# EAGLE board midi-switcher-panel5 (EAGLE 9.5.2), part 1 of 2
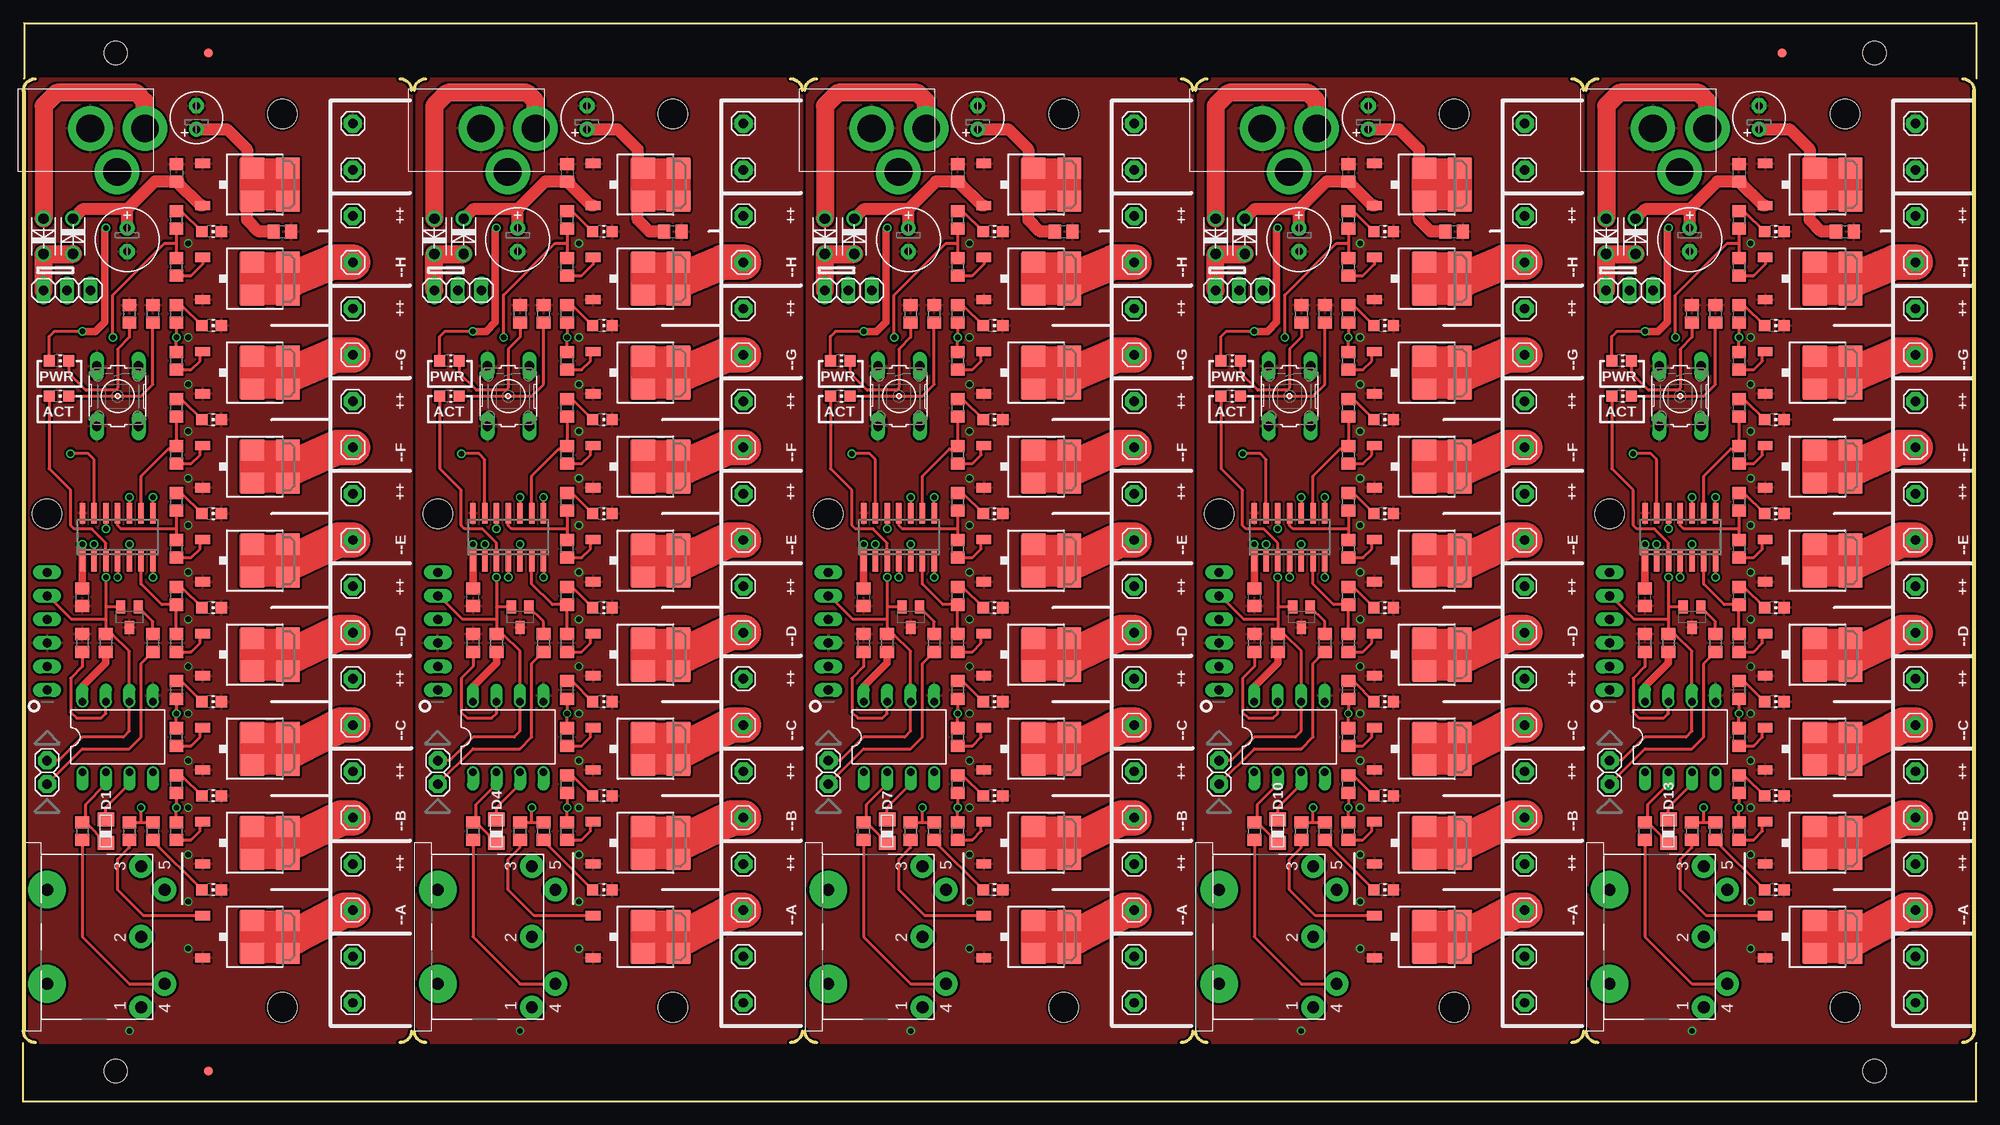
[diagram p0: board, top side]
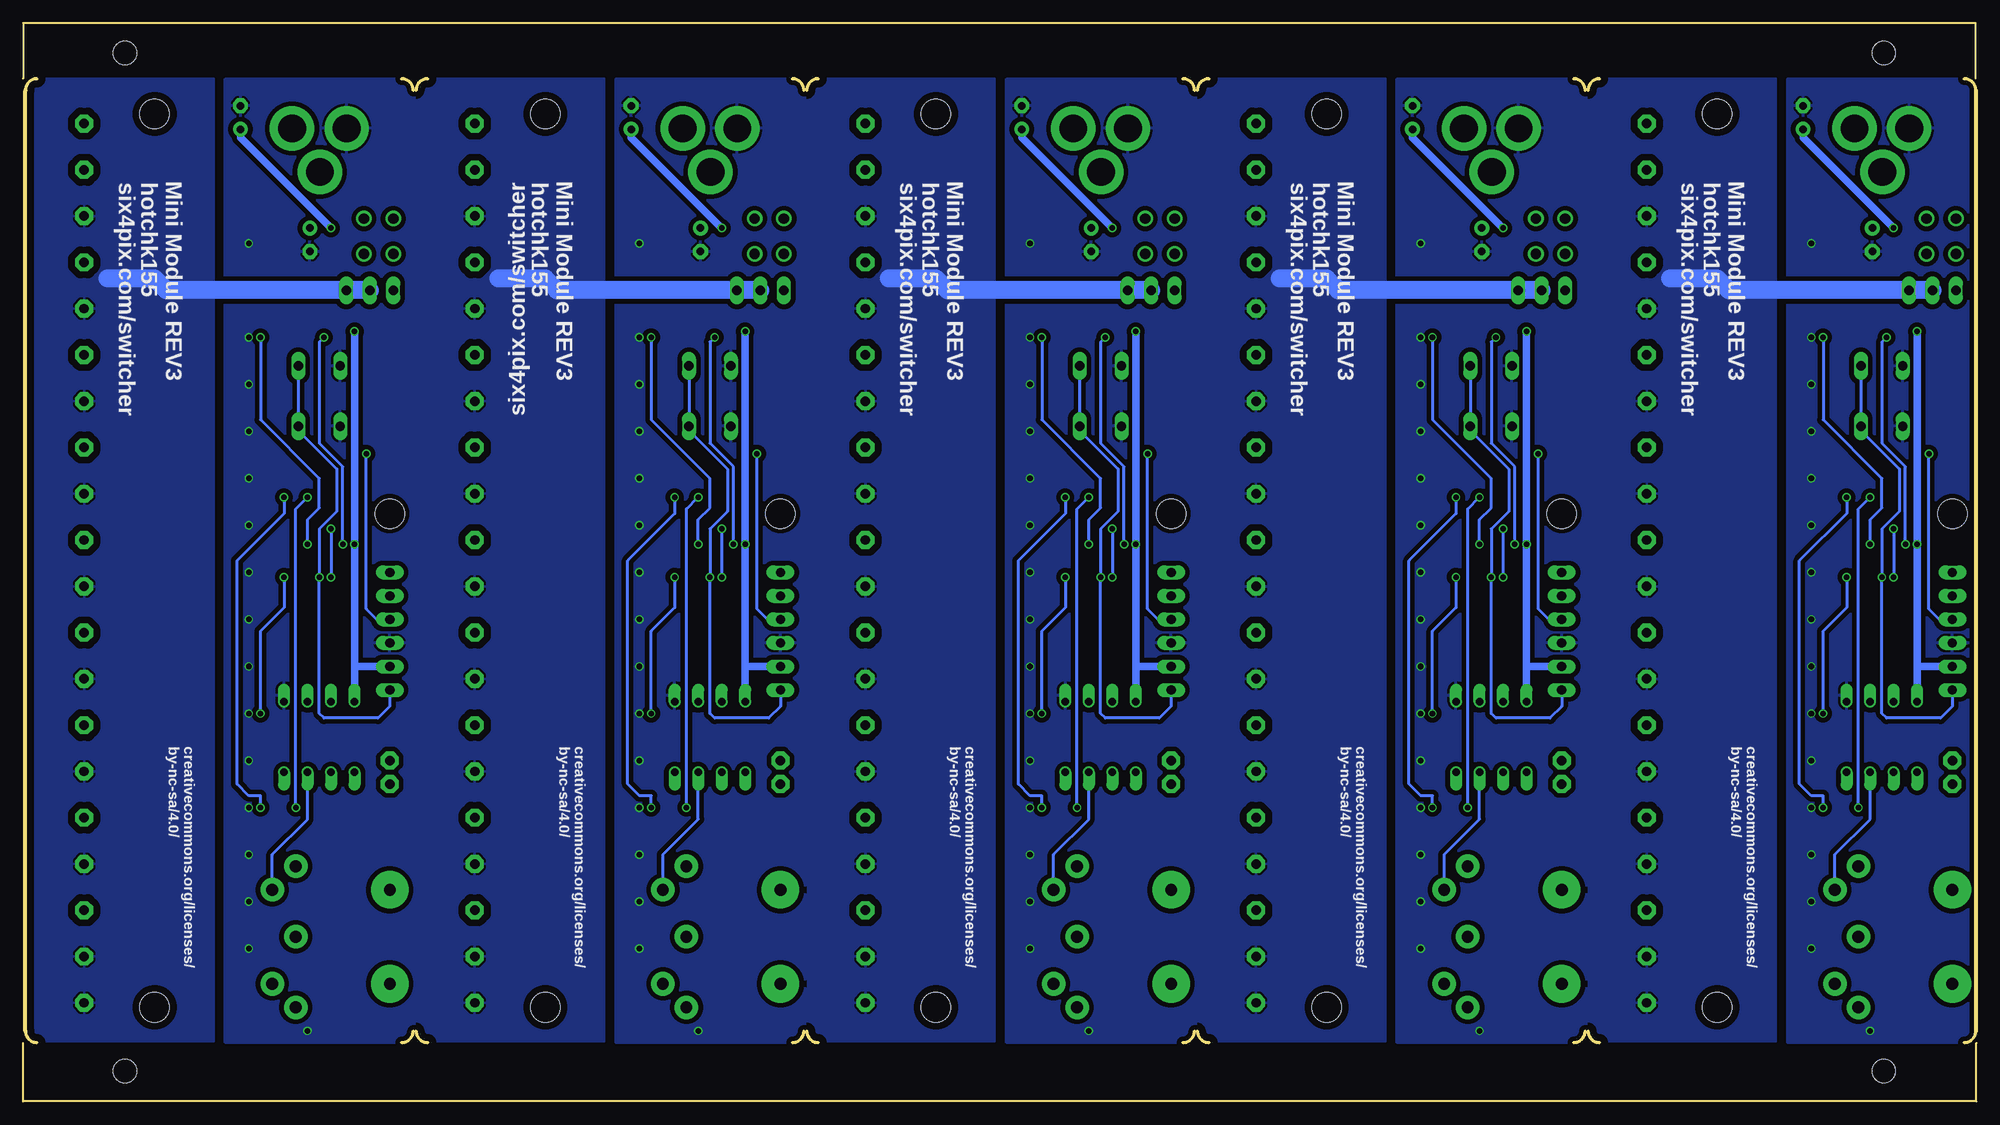
[diagram p1: board, bottom side, seen from below]

Size 211 x 116.5 mm. Coordinates in mm from the lower left corner, seen from the top.
Outline: 1.32,110.49 arc90 0.05,109.22 0.05,7.62 arc90 1.32,6.35
Outline: 40.69,110.49 arc-90 41.96,109.22
Outline: 41.96,7.62 arc-90 40.69,6.35
Outline: 42.25,109.22 arc-90 43.52,110.49
Outline: 82.89,110.49 arc-90 84.16,109.22
Outline: 84.16,7.62 arc-90 82.89,6.35
Outline: 43.52,6.35 arc-90 42.25,7.62
Outline: 84.45,109.22 arc-90 85.72,110.49
Outline: 125.09,110.49 arc-90 126.36,109.22
Outline: 126.36,7.62 arc-90 125.09,6.35
Outline: 85.72,6.35 arc-90 84.45,7.62
Outline: 126.65,109.22 arc-90 127.92,110.49
Outline: 167.29,110.49 arc-90 168.56,109.22
Outline: 168.56,7.62 arc-90 167.29,6.35
Outline: 127.92,6.35 arc-90 126.65,7.62
Outline: 168.85,109.22 arc-90 170.12,110.49
Outline: 209.49,110.49 arc-90 210.76,109.22 210.76,7.62 arc-90 209.49,6.35
Outline: 170.12,6.35 arc-90 168.85,7.62
Outline: 210.9,116.5 0.1,116.5 0.1,110.5
Outline: 0,6.3 0,0 211,0 211,6.3
Outline: 211,116.5 211,110.5
Copper layers (1*16): Top 0.035mm / dielectric 1.5mm / Bottom 0.035mm
Design rules "ITEADstudio_DRC": minimum track width 6mil, minimum drill 12mil, track to track 6mil, track to pad 6mil, pad to pad 6mil, via to via 6mil, smd to smd 0mil, copper to edge 10mil, drill to drill 10mil, minimum pad ring 10mil, minimum via ring 6mil, stop-mask expansion 2mil, vias tented up to drill 100mil, thermal gap 10mil
Holes 3.2 mm at 27.99,10.16 27.99,106.68 2.59,63.5 70.19,10.16 70.19,106.68 44.79,63.5 112.39,10.16 112.39,106.68 86.99,63.5 154.59,10.16 154.59,106.68 129.19,63.5 196.79,10.16 196.79,106.68 171.39,63.5
Holes 2.54 mm at 10,113.3 200,113.3 10,3.3 200,3.3

## Footprints (pad centres in the part's own frame; a part is rotated, then mirrored left to right if it is on the bottom)
C0805 = smd 1.3 x 1.5: 1 -0.95,0; 2 0.95,0
E2,5-7 = drill 0.813 pad 1.6: + -1.27,0 | drill 0.813 pad 1.6 octagon: - 1.27,0
E2,5-6 = drill 0.813 pad 1.6: + -1.27,0 | drill 0.813 pad 1.6 octagon: - 1.27,0
1X01 = drill 1.016 pad 1.93 octagon: 1 0,0
0805DIODE = smd 1.524 x 1.778: A -1.262,-0.005; C 1.238,-0.005
DO-VERT = drill 1.118: A 2.54,0; C -1.27,0
FIDUCIAL_1MM = smd 1 x 1: 1 0,0
DIL08 = drill 0.813 offset: 1 -3.81,-3.81; 2 -1.27,-3.81; 3 1.27,-3.81; 4 3.81,-3.81; 5 3.81,3.81; 6 1.27,3.81; 7 -1.27,3.81; 8 -3.81,3.81
SO14 = smd 0.6 x 2.2: 1 -3.81,-2.6; 2 -2.54,-2.6; 3 -1.27,-2.6; 4 0,-2.6; 5 1.27,-2.6; 6 2.54,-2.6; 7 3.81,-2.6; 8 3.81,2.6; 9 2.54,2.6; 10 1.27,2.6; 11 0,2.6; 12 -1.27,2.6; 13 -2.54,2.6; 14 -3.81,2.6
DPACK = smd 1 x 1.6: 1 -2.28,-4.8; 3 2.28,-4.8 | smd 2.286 x 2.54: 2 -1.778,4.405; 4 1.778,4.405; 5 -1.778,0.595; 6 1.778,0.595
1X06_OVAL = drill 1 long: 1 -6.35,0; 2 -3.81,0; 3 -1.27,0; 4 1.27,0; 5 3.81,0; 6 6.35,0
1X03 = drill 1.016 long: 1 -2.54,0; 2 0,0; 3 2.54,0
CHIP-LED0805 = smd 1.2 x 1.2: A 0,-1.05; C 0,1.05
TRUCONN90 = drill 1.27 pad 2.54: 1 7.62,5.08; 2 0,5.08; 3 -7.62,5.08; 4 5.08,7.62; 5 -5.08,7.62 | drill 1.27 pad 4.064: NC -5.08,-5.08; NC@ 5.08,-5.08
B3F-10XX = drill 1.016 long: 1 -3.251,2.261; 2 3.251,2.261; 3 -3.251,-2.261; 4 3.251,-2.261
SOT23-BEC = smd 1 x 1.4: B -0.95,-1.1; C 0,1.1; E 0.95,-1.1
R0805 = smd 1.3 x 1.5: 1 -0.95,0; 2 0.95,0
PJ-102A = drill 3 pad 4.8: RING 0.1,-3.39; RING_SW -4.6,-6.29; TIP 0.1,-9.29

## Placement (x,y rotation side)
C1  [C0805]  6.4,54.48 90 top
C2  [C0805]  27.99,93.98 0 top
C3  [C0805]  16.56,100.33 270 top
C4  [E2,5-7]  11.23,93.09 270 top
C5  [E2,5-6]  18.72,106.3 90 top
C6  [C0805]  70.19,93.98 0 top
C7  [C0805]  48.6,54.48 90 top
C8  [C0805]  58.76,100.33 270 top
C9  [E2,5-6]  60.92,106.3 90 top
C10  [E2,5-7]  53.43,93.09 270 top
C11  [C0805]  112.39,93.98 0 top
C12  [C0805]  90.8,54.48 90 top
C13  [C0805]  100.96,100.33 270 top
C14  [E2,5-6]  103.12,106.3 90 top
C15  [E2,5-7]  95.63,93.09 270 top
C16  [C0805]  154.59,93.98 0 top
C17  [C0805]  133,54.48 90 top
C18  [C0805]  143.16,100.33 270 top
C19  [E2,5-6]  145.32,106.3 90 top
C20  [E2,5-7]  137.83,93.09 270 top
C21  [C0805]  196.79,93.98 0 top
C22  [C0805]  175.2,54.48 90 top
C23  [C0805]  185.36,100.33 270 top
C24  [E2,5-6]  187.52,106.3 90 top
C25  [E2,5-7]  180.03,93.09 270 top
CHAIN_NEXT  [1X01]  2.59,36.83 90 top
CHAIN_NEXT1  [1X01]  44.79,36.83 90 top
CHAIN_NEXT2  [1X01]  86.99,36.83 90 top
CHAIN_NEXT3  [1X01]  129.19,36.83 90 top
CHAIN_NEXT4  [1X01]  171.39,36.83 90 top
CHAIN_PREV  [1X01]  2.59,34.29 90 top
CHAIN_PREV1  [1X01]  44.79,34.29 90 top
CHAIN_PREV2  [1X01]  86.99,34.29 90 top
CHAIN_PREV3  [1X01]  129.19,34.29 90 top
CHAIN_PREV4  [1X01]  171.39,34.29 90 top
D1  0805DIODE  [0805DIODE]  8.94,29.21 90 top
D2  1N4004  [DO-VERT]  2.21,92.84 90 top
D3  1N4004  [DO-VERT]  5.38,94.11 270 top
D4  0805DIODE  [0805DIODE]  51.14,29.21 90 top
D5  1N4004  [DO-VERT]  47.58,94.11 270 top
D6  1N4004  [DO-VERT]  44.41,92.84 90 top
D7  0805DIODE  [0805DIODE]  93.34,29.21 90 top
D8  1N4004  [DO-VERT]  89.78,94.11 270 top
D9  1N4004  [DO-VERT]  86.61,92.84 90 top
D10  0805DIODE  [0805DIODE]  135.54,29.21 90 top
D11  1N4004  [DO-VERT]  131.98,94.11 270 top
D12  1N4004  [DO-VERT]  128.81,92.84 90 top
D13  0805DIODE  [0805DIODE]  177.74,29.21 90 top
D14  1N4004  [DO-VERT]  174.18,94.11 270 top
D15  1N4004  [DO-VERT]  171.01,92.84 90 top
E$1  [FIDUCIAL_1MM]  20,113.3 0 top
E$2  [FIDUCIAL_1MM]  190,113.3 0 top
E$3  [FIDUCIAL_1MM]  20,3.3 0 top
IC1  6N138  [DIL08]  10.21,39.37 0 top
IC2  PIC16F1825SO14  [SO14]  10.21,60.96 0 top
IC3  LD1086  [DPACK]  24.18,99.06 270 top
IC4  PIC16F1825SO14  [SO14]  52.41,60.96 0 top
IC5  6N138  [DIL08]  52.41,39.37 0 top
IC6  LD1086  [DPACK]  66.38,99.06 270 top
IC7  PIC16F1825SO14  [SO14]  94.61,60.96 0 top
IC8  6N138  [DIL08]  94.61,39.37 0 top
IC9  LD1086  [DPACK]  108.58,99.06 270 top
IC10  PIC16F1825SO14  [SO14]  136.81,60.96 0 top
IC11  6N138  [DIL08]  136.81,39.37 0 top
IC12  LD1086  [DPACK]  150.78,99.06 270 top
IC13  PIC16F1825SO14  [SO14]  179.01,60.96 0 top
IC14  6N138  [DIL08]  179.01,39.37 0 top
IC15  LD1086  [DPACK]  192.98,99.06 270 top
ICSP  [1X06_OVAL]  2.59,50.8 90 top
ICSP1  [1X06_OVAL]  44.79,50.8 90 top
ICSP2  [1X06_OVAL]  86.99,50.8 90 top
ICSP3  [1X06_OVAL]  129.19,50.8 90 top
ICSP4  [1X06_OVAL]  171.39,50.8 90 top
JP1  [1X03]  46.95,87.63 0 top
JP2  [1X03]  89.15,87.63 0 top
JP3  [1X03]  4.75,87.63 0 top
JP4  [1X03]  131.35,87.63 0 top
JP5  [1X03]  173.55,87.63 0 top
L1  [CHIP-LED0805]  3.86,76.2 270 top
L2  [CHIP-LED0805]  3.86,80.01 270 top
L3  [CHIP-LED0805]  20.37,22.86 270 top
L4  [CHIP-LED0805]  20.37,33.02 270 top
L5  [CHIP-LED0805]  20.37,43.18 270 top
L6  [CHIP-LED0805]  20.37,53.34 270 top
L7  [CHIP-LED0805]  20.37,63.5 270 top
L8  [CHIP-LED0805]  20.37,73.66 270 top
L9  [CHIP-LED0805]  20.37,83.82 270 top
L10  [CHIP-LED0805]  20.37,93.98 270 top
L11  [CHIP-LED0805]  62.57,93.98 270 top
L12  [CHIP-LED0805]  62.57,83.82 270 top
L13  [CHIP-LED0805]  62.57,73.66 270 top
L14  [CHIP-LED0805]  62.57,63.5 270 top
L15  [CHIP-LED0805]  62.57,53.34 270 top
L16  [CHIP-LED0805]  62.57,43.18 270 top
L17  [CHIP-LED0805]  62.57,33.02 270 top
L18  [CHIP-LED0805]  62.57,22.86 270 top
L19  [CHIP-LED0805]  46.06,80.01 270 top
L20  [CHIP-LED0805]  46.06,76.2 270 top
L21  [CHIP-LED0805]  104.77,93.98 270 top
L22  [CHIP-LED0805]  104.77,83.82 270 top
L23  [CHIP-LED0805]  104.77,73.66 270 top
L24  [CHIP-LED0805]  104.77,63.5 270 top
L25  [CHIP-LED0805]  104.77,53.34 270 top
L26  [CHIP-LED0805]  104.77,43.18 270 top
L27  [CHIP-LED0805]  104.77,33.02 270 top
L28  [CHIP-LED0805]  104.77,22.86 270 top
L29  [CHIP-LED0805]  88.26,80.01 270 top
L30  [CHIP-LED0805]  88.26,76.2 270 top
L31  [CHIP-LED0805]  146.97,93.98 270 top
L32  [CHIP-LED0805]  146.97,83.82 270 top
L33  [CHIP-LED0805]  146.97,73.66 270 top
L34  [CHIP-LED0805]  146.97,63.5 270 top
L35  [CHIP-LED0805]  146.97,53.34 270 top
L36  [CHIP-LED0805]  146.97,43.18 270 top
L37  [CHIP-LED0805]  146.97,33.02 270 top
L38  [CHIP-LED0805]  146.97,22.86 270 top
L39  [CHIP-LED0805]  130.46,80.01 270 top
L40  [CHIP-LED0805]  130.46,76.2 270 top
L41  [CHIP-LED0805]  189.17,93.98 270 top
L42  [CHIP-LED0805]  189.17,83.82 270 top
L43  [CHIP-LED0805]  189.17,73.66 270 top
L44  [CHIP-LED0805]  189.17,63.5 270 top
L45  [CHIP-LED0805]  189.17,53.34 270 top
L46  [CHIP-LED0805]  189.17,43.18 270 top
L47  [CHIP-LED0805]  189.17,33.02 270 top
L48  [CHIP-LED0805]  189.17,22.86 270 top
L49  [CHIP-LED0805]  172.66,80.01 270 top
L50  [CHIP-LED0805]  172.66,76.2 270 top
MIDI_IN  DIN5PIN"  [TRUCONN90]  7.67,17.78 270 top
MIDI_IN1  DIN5PIN"  [TRUCONN90]  49.87,17.78 270 top
MIDI_IN2  DIN5PIN"  [TRUCONN90]  92.07,17.78 270 top
MIDI_IN3  DIN5PIN"  [TRUCONN90]  134.27,17.78 270 top
MIDI_IN4  DIN5PIN"  [TRUCONN90]  176.47,17.78 270 top
MODE  [B3F-10XX]  10.21,76.2 270 top
MODE1  [B3F-10XX]  52.41,76.2 270 top
MODE2  [B3F-10XX]  94.61,76.2 270 top
MODE3  [B3F-10XX]  136.81,76.2 270 top
MODE4  [B3F-10XX]  179.01,76.2 270 top
OP1+  [1X01]  35.61,25.65 90 top
OP1+1  [1X01]  77.81,25.65 90 top
OP1+2  [1X01]  120.01,25.65 90 top
OP1+3  [1X01]  162.21,25.65 90 top
OP1+4  [1X01]  204.41,25.65 90 top
OP1-  [1X01]  35.61,90.65 90 top
OP1-1  [1X01]  77.81,90.65 90 top
OP1-2  [1X01]  120.01,90.65 90 top
OP1-3  [1X01]  162.21,90.65 90 top
OP1-4  [1X01]  204.41,90.65 90 top
OP2+  [1X01]  35.61,95.65 90 top
OP2+1  [1X01]  77.81,95.65 90 top
OP2+2  [1X01]  120.01,95.65 90 top
OP2+3  [1X01]  162.21,95.65 90 top
OP2+4  [1X01]  204.41,95.65 90 top
OP2-  [1X01]  35.61,80.65 90 top
OP2-1  [1X01]  77.81,80.65 90 top
OP2-2  [1X01]  120.01,80.65 90 top
OP2-3  [1X01]  162.21,80.65 90 top
OP2-4  [1X01]  204.41,80.65 90 top
OP3+  [1X01]  35.61,85.65 90 top
OP3+1  [1X01]  77.81,85.65 90 top
OP3+2  [1X01]  120.01,85.65 90 top
OP3+3  [1X01]  162.21,85.65 90 top
OP3+4  [1X01]  204.41,85.65 90 top
OP3-  [1X01]  35.61,70.65 90 top
OP3-1  [1X01]  77.81,70.65 90 top
OP3-2  [1X01]  120.01,70.65 90 top
OP3-3  [1X01]  162.21,70.65 90 top
OP3-4  [1X01]  204.41,70.65 90 top
OP4+  [1X01]  35.61,75.65 90 top
OP4+1  [1X01]  77.81,75.65 90 top
OP4+2  [1X01]  120.01,75.65 90 top
OP4+3  [1X01]  162.21,75.65 90 top
OP4+4  [1X01]  204.41,75.65 90 top
OP4-  [1X01]  35.61,60.65 90 top
OP4-1  [1X01]  77.81,60.65 90 top
OP4-2  [1X01]  120.01,60.65 90 top
OP4-3  [1X01]  162.21,60.65 90 top
OP4-4  [1X01]  204.41,60.65 90 top
OP5+  [1X01]  35.61,65.65 90 top
OP5+1  [1X01]  77.81,65.65 90 top
OP5+2  [1X01]  120.01,65.65 90 top
OP5+3  [1X01]  162.21,65.65 90 top
OP5+4  [1X01]  204.41,65.65 90 top
OP5-  [1X01]  35.61,50.65 90 top
OP5-1  [1X01]  77.81,50.65 90 top
OP5-2  [1X01]  120.01,50.65 90 top
OP5-3  [1X01]  162.21,50.65 90 top
OP5-4  [1X01]  204.41,50.65 90 top
OP6-  [1X01]  35.61,40.65 90 top
OP6-1  [1X01]  77.81,40.65 90 top
OP6-2  [1X01]  120.01,40.65 90 top
OP6-3  [1X01]  162.21,40.65 90 top
OP6-4  [1X01]  204.41,40.65 90 top
OP7+  [1X01]  35.61,45.65 90 top
OP7+1  [1X01]  77.81,45.65 90 top
OP7+2  [1X01]  120.01,45.65 90 top
OP7+3  [1X01]  162.21,45.65 90 top
OP7+4  [1X01]  204.41,45.65 90 top
OP7-  [1X01]  35.61,30.65 90 top
OP7-1  [1X01]  77.81,30.65 90 top
OP7-2  [1X01]  120.01,30.65 90 top
OP7-3  [1X01]  162.21,30.65 90 top
OP7-4  [1X01]  204.41,30.65 90 top
OP8+  [1X01]  35.61,35.65 90 top
OP8+1  [1X01]  35.61,55.65 90 top
OP8+2  [1X01]  77.81,35.65 90 top
OP8+3  [1X01]  77.81,55.65 90 top
OP8+4  [1X01]  120.01,35.65 90 top
OP8+5  [1X01]  120.01,55.65 90 top
OP8+6  [1X01]  162.21,35.65 90 top
OP8+7  [1X01]  162.21,55.65 90 top
OP8+8  [1X01]  204.41,35.65 90 top
OP8+9  [1X01]  204.41,55.65 90 top
OP8-  [1X01]  35.61,20.65 90 top
OP8-1  [1X01]  77.81,20.65 90 top
OP8-2  [1X01]  120.01,20.65 90 top
OP8-3  [1X01]  162.21,20.65 90 top
OP8-4  [1X01]  204.41,20.65 90 top
POWER+1  [1X01]  35.61,15.65 90 top
POWER+2  [1X01]  35.61,10.65 90 top
POWER+3  [1X01]  77.81,15.65 90 top
POWER+4  [1X01]  77.81,10.65 90 top
POWER+5  [1X01]  120.01,15.65 90 top
POWER+6  [1X01]  120.01,10.65 90 top
POWER+7  [1X01]  162.21,15.65 90 top
POWER+8  [1X01]  162.21,10.65 90 top
POWER+9  [1X01]  204.41,15.65 90 top
POWER+10  [1X01]  204.41,10.65 90 top
POWER-1  [1X01]  35.61,105.65 90 top
POWER-2  [1X01]  35.61,100.65 90 top
POWER-3  [1X01]  77.81,105.65 90 top
POWER-4  [1X01]  77.81,100.65 90 top
POWER-5  [1X01]  120.01,105.65 90 top
POWER-6  [1X01]  120.01,100.65 90 top
POWER-7  [1X01]  162.21,105.65 90 top
POWER-8  [1X01]  162.21,100.65 90 top
POWER-9  [1X01]  204.41,105.65 90 top
POWER-10  [1X01]  204.41,100.65 90 top
Q1  MJD122GDPAK  [DPACK]  24.18,17.78 270 top
Q2  MJD122GDPAK  [DPACK]  24.18,27.94 270 top
Q3  MJD122GDPAK  [DPACK]  24.18,38.1 270 top
Q4  MJD122GDPAK  [DPACK]  24.18,48.26 270 top
Q5  MJD122GDPAK  [DPACK]  24.18,58.42 270 top
Q6  MJD122GDPAK  [DPACK]  24.18,68.58 270 top
Q7  MJD122GDPAK  [DPACK]  24.18,78.74 270 top
Q8  MJD122GDPAK  [DPACK]  24.18,88.9 270 top
Q9  [SOT23-BEC]  11.48,52.32 180 top
Q10  MJD122GDPAK  [DPACK]  66.38,88.9 270 top
Q11  MJD122GDPAK  [DPACK]  66.38,78.74 270 top
Q12  MJD122GDPAK  [DPACK]  66.38,68.58 270 top
Q13  MJD122GDPAK  [DPACK]  66.38,58.42 270 top
Q14  MJD122GDPAK  [DPACK]  66.38,48.26 270 top
Q15  MJD122GDPAK  [DPACK]  66.38,38.1 270 top
Q16  MJD122GDPAK  [DPACK]  66.38,27.94 270 top
Q17  MJD122GDPAK  [DPACK]  66.38,17.78 270 top
Q18  [SOT23-BEC]  53.68,52.32 180 top
Q19  MJD122GDPAK  [DPACK]  108.58,88.9 270 top
Q20  MJD122GDPAK  [DPACK]  108.58,78.74 270 top
Q21  MJD122GDPAK  [DPACK]  108.58,68.58 270 top
Q22  MJD122GDPAK  [DPACK]  108.58,58.42 270 top
Q23  MJD122GDPAK  [DPACK]  108.58,48.26 270 top
Q24  MJD122GDPAK  [DPACK]  108.58,38.1 270 top
Q25  MJD122GDPAK  [DPACK]  108.58,27.94 270 top
Q26  MJD122GDPAK  [DPACK]  108.58,17.78 270 top
Q27  [SOT23-BEC]  95.88,52.32 180 top
Q28  MJD122GDPAK  [DPACK]  150.78,88.9 270 top
Q29  MJD122GDPAK  [DPACK]  150.78,78.74 270 top
Q30  MJD122GDPAK  [DPACK]  150.78,68.58 270 top
Q31  MJD122GDPAK  [DPACK]  150.78,58.42 270 top
Q32  MJD122GDPAK  [DPACK]  150.78,48.26 270 top
Q33  MJD122GDPAK  [DPACK]  150.78,38.1 270 top
Q34  MJD122GDPAK  [DPACK]  150.78,27.94 270 top
Q35  MJD122GDPAK  [DPACK]  150.78,17.78 270 top
Q36  [SOT23-BEC]  138.08,52.32 180 top
Q37  MJD122GDPAK  [DPACK]  192.98,88.9 270 top
Q38  MJD122GDPAK  [DPACK]  192.98,78.74 270 top
Q39  MJD122GDPAK  [DPACK]  192.98,68.58 270 top
Q40  MJD122GDPAK  [DPACK]  192.98,58.42 270 top
Q41  MJD122GDPAK  [DPACK]  192.98,48.26 270 top
Q42  MJD122GDPAK  [DPACK]  192.98,38.1 270 top
Q43  MJD122GDPAK  [DPACK]  192.98,27.94 270 top
Q44  MJD122GDPAK  [DPACK]  192.98,17.78 270 top
Q45  [SOT23-BEC]  180.28,52.32 180 top
R1  [R0805]  6.4,29.21 270 top
R2  [R0805]  11.48,29.21 90 top
R3  [R0805]  14.02,29.21 270 top
R4  [R0805]  48.6,29.21 270 top
R5  [R0805]  51.14,49.53 270 top
R6  [R0805]  48.6,49.53 270 top
R7  [R0805]  16.56,29.21 90 top
R8  [R0805]  16.56,34.29 90 top
R9  [R0805]  16.56,39.37 90 top
R10  [R0805]  16.56,44.45 90 top
R11  [R0805]  16.56,49.53 90 top
R12  [R0805]  16.56,54.61 90 top
R13  [R0805]  16.56,59.69 90 top
R14  [R0805]  16.56,64.77 90 top
R15  [R0805]  16.56,69.85 90 top
R16  [R0805]  16.56,74.93 90 top
R17  [R0805]  16.56,80.01 90 top
R18  [R0805]  16.56,85.09 90 top
R19  [R0805]  16.56,90.17 90 top
R20  [R0805]  16.56,95.25 90 top
R21  [R0805]  6.4,49.53 270 top
R22  [R0805]  8.94,49.53 270 top
R23  [R0805]  14.02,49.53 90 top
R24  [R0805]  11.48,85.09 90 top
R25  [R0805]  14.02,85.09 90 top
R26  [R0805]  58.76,90.17 90 top
R27  [R0805]  58.76,80.01 90 top
R28  [R0805]  58.76,69.85 90 top
R29  [R0805]  58.76,59.69 90 top
R30  [R0805]  58.76,49.53 90 top
R31  [R0805]  58.76,39.37 90 top
R32  [R0805]  58.76,29.21 90 top
R33  [R0805]  53.68,29.21 90 top
R34  [R0805]  58.76,95.25 90 top
R35  [R0805]  58.76,85.09 90 top
R36  [R0805]  58.76,74.93 90 top
R37  [R0805]  58.76,64.77 90 top
R38  [R0805]  58.76,54.61 90 top
R39  [R0805]  58.76,44.45 90 top
R40  [R0805]  58.76,34.29 90 top
R41  [R0805]  56.22,29.21 270 top
R42  [R0805]  53.68,85.09 90 top
R43  [R0805]  56.22,85.09 90 top
R44  [R0805]  56.22,49.53 90 top
R45  [R0805]  90.8,29.21 270 top
R46  [R0805]  93.34,49.53 270 top
R47  [R0805]  90.8,49.53 270 top
R48  [R0805]  100.96,90.17 90 top
R49  [R0805]  100.96,80.01 90 top
R50  [R0805]  100.96,69.85 90 top
R51  [R0805]  100.96,59.69 90 top
R52  [R0805]  100.96,49.53 90 top
R53  [R0805]  100.96,39.37 90 top
R54  [R0805]  100.96,29.21 90 top
R55  [R0805]  95.88,29.21 90 top
R56  [R0805]  100.96,95.25 90 top
R57  [R0805]  100.96,85.09 90 top
R58  [R0805]  100.96,74.93 90 top
R59  [R0805]  100.96,64.77 90 top
R60  [R0805]  100.96,54.61 90 top
R61  [R0805]  100.96,44.45 90 top
R62  [R0805]  100.96,34.29 90 top
R63  [R0805]  98.42,29.21 270 top
R64  [R0805]  95.88,85.09 90 top
R65  [R0805]  98.42,85.09 90 top
R66  [R0805]  98.42,49.53 90 top
R67  [R0805]  133,29.21 270 top
R68  [R0805]  135.54,49.53 270 top
R69  [R0805]  133,49.53 270 top
R70  [R0805]  143.16,90.17 90 top
R71  [R0805]  143.16,80.01 90 top
R72  [R0805]  143.16,69.85 90 top
R73  [R0805]  143.16,59.69 90 top
R74  [R0805]  143.16,49.53 90 top
R75  [R0805]  143.16,39.37 90 top
R76  [R0805]  143.16,29.21 90 top
R77  [R0805]  138.08,29.21 90 top
R78  [R0805]  143.16,95.25 90 top
R79  [R0805]  143.16,85.09 90 top
R80  [R0805]  143.16,74.93 90 top
R81  [R0805]  143.16,64.77 90 top
R82  [R0805]  143.16,54.61 90 top
R83  [R0805]  143.16,44.45 90 top
R84  [R0805]  143.16,34.29 90 top
R85  [R0805]  140.62,29.21 270 top
R86  [R0805]  138.08,85.09 90 top
R87  [R0805]  140.62,85.09 90 top
R88  [R0805]  140.62,49.53 90 top
R89  [R0805]  175.2,29.21 270 top
R90  [R0805]  177.74,49.53 270 top
R91  [R0805]  175.2,49.53 270 top
R92  [R0805]  185.36,90.17 90 top
R93  [R0805]  185.36,80.01 90 top
R94  [R0805]  185.36,69.85 90 top
R95  [R0805]  185.36,59.69 90 top
R96  [R0805]  185.36,49.53 90 top
R97  [R0805]  185.36,39.37 90 top
R98  [R0805]  185.36,29.21 90 top
R99  [R0805]  180.28,29.21 90 top
R100  [R0805]  185.36,95.25 90 top
R101  [R0805]  185.36,85.09 90 top
R102  [R0805]  185.36,74.93 90 top
R103  [R0805]  185.36,64.77 90 top
R104  [R0805]  185.36,54.61 90 top
R105  [R0805]  185.36,44.45 90 top
R106  [R0805]  185.36,34.29 90 top
R107  [R0805]  182.82,29.21 270 top
R108  [R0805]  180.28,85.09 90 top
R109  [R0805]  182.82,85.09 90 top
R110  [R0805]  182.82,49.53 90 top
U$1  2.1MMJACKTHM  [PJ-102A]  3.86,105.03 90 top
U$2  2.1MMJACKTHM  [PJ-102A]  46.06,105.03 90 top
U$3  2.1MMJACKTHM  [PJ-102A]  88.26,105.03 90 top
U$4  2.1MMJACKTHM  [PJ-102A]  130.46,105.03 90 top
U$5  2.1MMJACKTHM  [PJ-102A]  172.66,105.03 90 top

## Library data of the parts
C1-C25 R1-R110 = rcl
CHAIN_NEXT CHAIN_NEXT1-CHAIN_NEXT4 CHAIN_PREV CHAIN_PREV1-CHAIN_PREV4 E$1-E$3 OP1+ OP1+1-OP1+4 OP1- OP1-1-OP1-4 OP2+ OP2+1-OP2+4 OP2- OP2-1-OP2-4 OP3+ OP3+1-OP3+4 OP3- OP3-1-OP3-4 OP4+ OP4+1-OP4+4 OP4- OP4-1-OP4-4 OP5+ OP5+1-OP5+4 OP5- OP5-1-OP5-4 OP6- OP6-1-OP6-4 OP7+ OP7+1-OP7+4 OP7- OP7-1-OP7-4 OP8+ OP8+1-OP8+9 OP8- OP8-1-OP8-4 POWER+1-POWER+10 POWER-1-POWER-10 U$1-U$5 = adafruit
D1-D15 IC2 IC4 IC7 IC10 IC13 MIDI_IN MIDI_IN1-MIDI_IN4 = jasons_stuff
IC1 IC5 IC8 IC11 IC14 = optocoupler
IC3 IC6 IC9 IC12 IC15 Q1-Q8 Q10-Q17 Q19-Q26 Q28-Q35 Q37-Q44 = jason_eagle6
ICSP ICSP1-ICSP4 = microbuilder
JP1-JP5 = pinhead
L1-L50 = led
MODE MODE1-MODE4 = switch-omron
Q9 Q18 Q27 Q36 Q45 = transistor

## Nets
+5V: C1.2 C2.1 C5.+ IC1.8 IC2.1 IC3.2 ICSP.2 L2.A R22.2
+5V1: C6.1 C7.2 C9.+ IC4.1 IC5.8 IC6.2 ICSP1.2 L19.A R5.2
+5V2: C11.1 C12.2 C14.+ IC7.1 IC8.8 IC9.2 ICSP2.2 L29.A R46.2
+5V3: C16.1 C17.2 C19.+ IC10.1 IC11.8 IC12.2 ICSP3.2 L39.A R68.2
+5V4: C21.1 C22.2 C24.+ IC13.1 IC14.8 IC15.2 ICSP4.2 L49.A R90.2
+12V: JP3.2 JP3.3 OP1+.1 OP2+.1 OP3+.1 OP4+.1 OP5+.1 OP7+.1 OP8+1.1 OP8+.1 POWER+1.1 POWER+2.1
+12V1: JP1.2 JP1.3 OP1+1.1 OP2+1.1 OP3+1.1 OP4+1.1 OP5+1.1 OP7+1.1 OP8+2.1 OP8+3.1 POWER+3.1 POWER+4.1
+12V2: JP2.2 JP2.3 OP1+2.1 OP2+2.1 OP3+2.1 OP4+2.1 OP5+2.1 OP7+2.1 OP8+4.1 OP8+5.1 POWER+5.1 POWER+6.1
+12V3: JP4.2 JP4.3 OP1+3.1 OP2+3.1 OP3+3.1 OP4+3.1 OP5+3.1 OP7+3.1 OP8+6.1 OP8+7.1 POWER+7.1 POWER+8.1
+12V4: JP5.2 JP5.3 OP1+4.1 OP2+4.1 OP3+4.1 OP4+4.1 OP5+4.1 OP7+4.1 OP8+8.1 OP8+9.1 POWER+9.1 POWER+10.1
ACT_LED: IC2.3 L1.A
ACT_LED1: IC4.3 L20.A
ACT_LED2: IC7.3 L30.A
ACT_LED3: IC10.3 L40.A
ACT_LED4: IC13.3 L50.A
GND: C1.1 C2.2 C3.1 C4.- C5.- IC1.5 IC2.14 IC3.1 ICSP.3 L3.C L4.C L5.C L6.C L7.C L8.C L9.C L10.C MODE.3 MODE.4 POWER-1.1 POWER-2.1 Q1.3 Q2.3 Q3.3 Q4.3 Q5.3 Q6.3 Q7.3 Q8.3 Q9.C R21.1 R24.2 R25.2 U$1.RING
GND1: C6.2 C7.1 C8.1 C9.- C10.- IC4.14 IC5.5 IC6.1 ICSP1.3 L11.C L12.C L13.C L14.C L15.C L16.C L17.C L18.C MODE1.3 MODE1.4 POWER-3.1 POWER-4.1 Q10.3 Q11.3 Q12.3 Q13.3 Q14.3 Q15.3 Q16.3 Q17.3 Q18.C R6.1 R42.2 R43.2 U$2.RING
GND2: C11.2 C12.1 C13.1 C14.- C15.- IC7.14 IC8.5 IC9.1 ICSP2.3 L21.C L22.C L23.C L24.C L25.C L26.C L27.C L28.C MODE2.3 MODE2.4 POWER-5.1 POWER-6.1 Q19.3 Q20.3 Q21.3 Q22.3 Q23.3 Q24.3 Q25.3 Q26.3 Q27.C R47.1 R64.2 R65.2 U$3.RING
GND3: C16.2 C17.1 C18.1 C19.- C20.- IC10.14 IC11.5 IC12.1 ICSP3.3 L31.C L32.C L33.C L34.C L35.C L36.C L37.C L38.C MODE3.3 MODE3.4 POWER-7.1 POWER-8.1 Q28.3 Q29.3 Q30.3 Q31.3 Q32.3 Q33.3 Q34.3 Q35.3 Q36.C R69.1 R86.2 R87.2 U$4.RING
GND4: C21.2 C22.1 C23.1 C24.- C25.- IC13.14 IC14.5 IC15.1 ICSP4.3 L41.C L42.C L43.C L44.C L45.C L46.C L47.C L48.C MODE4.3 MODE4.4 POWER-9.1 POWER-10.1 Q37.3 Q38.3 Q39.3 Q40.3 Q41.3 Q42.3 Q43.3 Q44.3 Q45.C R91.1 R108.2 R109.2 U$5.RING
MIDI_IN: CHAIN_NEXT.1 IC1.6 IC2.12 ICSP.5 Q9.E R22.1
MIDI_IN1: CHAIN_NEXT1.1 IC4.12 IC5.6 ICSP1.5 Q18.E R5.1
MIDI_IN2: CHAIN_NEXT2.1 IC7.12 IC8.6 ICSP2.5 Q27.E R46.1
MIDI_IN3: CHAIN_NEXT3.1 IC10.12 IC11.6 ICSP3.5 Q36.E R68.1
MIDI_IN4: CHAIN_NEXT4.1 IC13.12 IC14.6 ICSP4.5 Q45.E R90.1
N$1: D1.C IC1.3 MIDI_IN.5
N$2: MIDI_IN.4 R1.2
N$3: D1.A IC1.2 R1.1
N$4: IC1.7 R21.2
N$5: L1.C R25.1
N$6: L10.A R20.2
N$7: L9.A R18.2
N$8: Q8.1 R19.1
N$9: Q7.1 R17.1
N$10: Q6.1 R15.1
N$11: Q5.1 R13.1
N$12: Q4.1 R11.1
N$13: Q3.1 R9.1
N$14: Q2.1 R7.1
N$15: Q1.1 R2.1
N$16: Q9.B R23.2
N$17: Q11.1 R27.1
N$18: CHAIN_PREV.1 R23.1
N$19: Q12.1 R28.1
N$20: Q13.1 R29.1
N$21: Q14.1 R30.1
N$22: Q15.1 R31.1
N$23: Q16.1 R32.1
N$24: L8.A R16.2
N$25: OP1-.1 Q8.2
N$26: OP2-.1 Q7.2
N$27: OP3-.1 Q6.2
N$28: L2.C R24.1
N$29: OP5-.1 Q4.2
N$30: OP6-.1 Q3.2
N$31: OP4-.1 Q5.2
N$32: Q17.1 R33.1
N$33: L7.A R14.2
N$34: L11.A R34.2
N$35: L6.A R12.2
N$36: L5.A R10.2
N$37: L4.A R8.2
N$38: L3.A R3.2
N$39: C3.2 C4.+ D3.C IC3.3
N$40: L12.A R35.2
N$41: L13.A R36.2
N$42: OP7-.1 Q2.2
N$43: D2.A U$1.TIP
N$44: L14.A R37.2
N$45: L15.A R38.2
N$46: L16.A R39.2
N$47: OP8-.1 Q1.2
N$48: L17.A R40.2
N$49: L18.A R41.2
N$50: C8.2 C10.+ D5.C IC6.3
N$51: IC2.13 ICSP.4
N$52: OP1-1.1 Q10.2
N$53: OP2-1.1 Q11.2
N$54: D2.C D3.A JP3.1
N$55: OP3-1.1 Q12.2
N$56: OP5-1.1 Q14.2
N$57: OP6-1.1 Q15.2
N$58: OP4-1.1 Q13.2
N$59: OP7-1.1 Q16.2
N$60: OP8-1.1 Q17.2
N$61: IC4.13 ICSP1.4
N$62: D6.A U$2.TIP
N$63: D5.A D6.C JP1.1
N$64: L19.C R42.1
N$65: L20.C R43.1
N$66: D4.C IC5.3 MIDI_IN1.5
N$67: MIDI_IN1.4 R4.2
N$68: D4.A IC5.2 R4.1
N$69: IC5.7 R6.2
N$70: Q18.B R44.2
N$71: CHAIN_PREV1.1 R44.1
N$72: Q10.1 R26.1
N$73: Q20.1 R49.1
N$74: Q21.1 R50.1
N$75: Q22.1 R51.1
N$76: Q23.1 R52.1
N$77: Q24.1 R53.1
N$78: Q25.1 R54.1
N$79: Q26.1 R55.1
N$80: L21.A R56.2
N$81: L22.A R57.2
N$82: L23.A R58.2
N$83: L24.A R59.2
N$84: L25.A R60.2
N$85: L26.A R61.2
N$86: L27.A R62.2
N$87: L28.A R63.2
N$88: C13.2 C15.+ D8.C IC9.3
N$89: OP1-2.1 Q19.2
N$90: OP2-2.1 Q20.2
N$91: OP3-2.1 Q21.2
N$92: OP5-2.1 Q23.2
N$93: OP6-2.1 Q24.2
N$94: OP4-2.1 Q22.2
N$95: OP7-2.1 Q25.2
N$96: OP8-2.1 Q26.2
N$97: IC7.13 ICSP2.4
N$98: D9.A U$3.TIP
N$99: D8.A D9.C JP2.1
N$100: L29.C R64.1
N$101: L30.C R65.1
N$102: D7.C IC8.3 MIDI_IN2.5
N$103: MIDI_IN2.4 R45.2
N$104: D7.A IC8.2 R45.1
N$105: IC8.7 R47.2
N$106: Q27.B R66.2
N$107: CHAIN_PREV2.1 R66.1
N$108: Q19.1 R48.1
N$109: Q29.1 R71.1
N$110: Q30.1 R72.1
N$111: Q31.1 R73.1
N$112: Q32.1 R74.1
N$113: Q33.1 R75.1
N$114: Q34.1 R76.1
N$115: Q35.1 R77.1
N$116: L31.A R78.2
N$117: L32.A R79.2
N$118: L33.A R80.2
N$119: L34.A R81.2
N$120: L35.A R82.2
N$121: L36.A R83.2
N$122: L37.A R84.2
N$123: L38.A R85.2
N$124: C18.2 C20.+ D11.C IC12.3
N$125: OP1-3.1 Q28.2
N$126: OP2-3.1 Q29.2
N$127: OP3-3.1 Q30.2
N$128: OP5-3.1 Q32.2
N$129: OP6-3.1 Q33.2
N$130: OP4-3.1 Q31.2
N$131: OP7-3.1 Q34.2
N$132: OP8-3.1 Q35.2
N$133: IC10.13 ICSP3.4
N$134: D12.A U$4.TIP
N$135: D11.A D12.C JP4.1
N$136: L39.C R86.1
N$137: L40.C R87.1
N$138: D10.C IC11.3 MIDI_IN3.5
N$139: MIDI_IN3.4 R67.2
N$140: D10.A IC11.2 R67.1
N$141: IC11.7 R69.2
N$142: Q36.B R88.2
N$143: CHAIN_PREV3.1 R88.1
N$144: Q28.1 R70.1
N$145: Q38.1 R93.1
N$146: Q39.1 R94.1
N$147: Q40.1 R95.1
N$148: Q41.1 R96.1
N$149: Q42.1 R97.1
N$150: Q43.1 R98.1
N$151: Q44.1 R99.1
N$152: L41.A R100.2
N$153: L42.A R101.2
N$154: L43.A R102.2
N$155: L44.A R103.2
N$156: L45.A R104.2
N$157: L46.A R105.2
N$158: L47.A R106.2
N$159: L48.A R107.2
N$160: C23.2 C25.+ D14.C IC15.3
N$161: OP1-4.1 Q37.2
N$162: OP2-4.1 Q38.2
N$163: OP3-4.1 Q39.2
N$164: OP5-4.1 Q41.2
N$165: OP6-4.1 Q42.2
N$166: OP4-4.1 Q40.2
N$167: OP7-4.1 Q43.2
N$168: OP8-4.1 Q44.2
N$169: IC13.13 ICSP4.4
N$170: D15.A U$5.TIP
N$171: D14.A D15.C JP5.1
N$172: L49.C R108.1
N$173: L50.C R109.1
N$174: D13.C IC14.3 MIDI_IN4.5
N$175: MIDI_IN4.4 R89.2
N$176: D13.A IC14.2 R89.1
N$177: IC14.7 R91.2
N$178: Q45.B R110.2
N$179: CHAIN_PREV4.1 R110.1
N$180: Q37.1 R92.1
OUT1: IC2.2 R19.2 R20.1
OUT2: IC2.5 R17.2 R18.1
OUT3: IC2.9 R15.2 R16.1
OUT4: IC2.11 R13.2 R14.1
OUT5: IC2.6 R11.2 R12.1
OUT6: IC2.7 R9.2 R10.1
OUT7: IC2.8 R7.2 R8.1
OUT8: IC2.10 R2.2 R3.1
OUT9: IC4.9 R28.2 R36.1
OUT10: IC4.11 R29.2 R37.1
OUT11: IC4.6 R30.2 R38.1
OUT12: IC4.7 R31.2 R39.1
OUT13: IC4.5 R27.2 R35.1
OUT14: IC4.2 R26.2 R34.1
OUT15: IC4.10 R33.2 R41.1
OUT16: IC4.8 R32.2 R40.1
OUT17: IC7.9 R50.2 R58.1
OUT18: IC7.11 R51.2 R59.1
OUT19: IC7.6 R52.2 R60.1
OUT20: IC7.7 R53.2 R61.1
OUT21: IC7.5 R49.2 R57.1
OUT22: IC7.2 R48.2 R56.1
OUT23: IC7.10 R55.2 R63.1
OUT24: IC7.8 R54.2 R62.1
OUT25: IC10.9 R72.2 R80.1
OUT26: IC10.11 R73.2 R81.1
OUT27: IC10.6 R74.2 R82.1
OUT28: IC10.7 R75.2 R83.1
OUT29: IC10.5 R71.2 R79.1
OUT30: IC10.2 R70.2 R78.1
OUT31: IC10.10 R77.2 R85.1
OUT32: IC10.8 R76.2 R84.1
OUT33: IC13.9 R94.2 R102.1
OUT34: IC13.11 R95.2 R103.1
OUT35: IC13.6 R96.2 R104.1
OUT36: IC13.7 R97.2 R105.1
OUT37: IC13.5 R93.2 R101.1
OUT38: IC13.2 R92.2 R100.1
OUT39: IC13.10 R99.2 R107.1
OUT40: IC13.8 R98.2 R106.1
SWITCH: IC2.4 ICSP.1 MODE.1 MODE.2
SWITCH1: IC4.4 ICSP1.1 MODE1.1 MODE1.2
SWITCH2: IC7.4 ICSP2.1 MODE2.1 MODE2.2
SWITCH3: IC10.4 ICSP3.1 MODE3.1 MODE3.2
SWITCH4: IC13.4 ICSP4.1 MODE4.1 MODE4.2